# Altium PCB PCB.PcbDoc
Units mm, origin at the board's own origin, x right, y up, seen from the top; angles counter-clockwise.
Board outline 197.79 x 99.26 mm, 2 copper layers (Top Layer, Bottom Layer); 45 components, 39 nets, 173 pads, 0 vias.
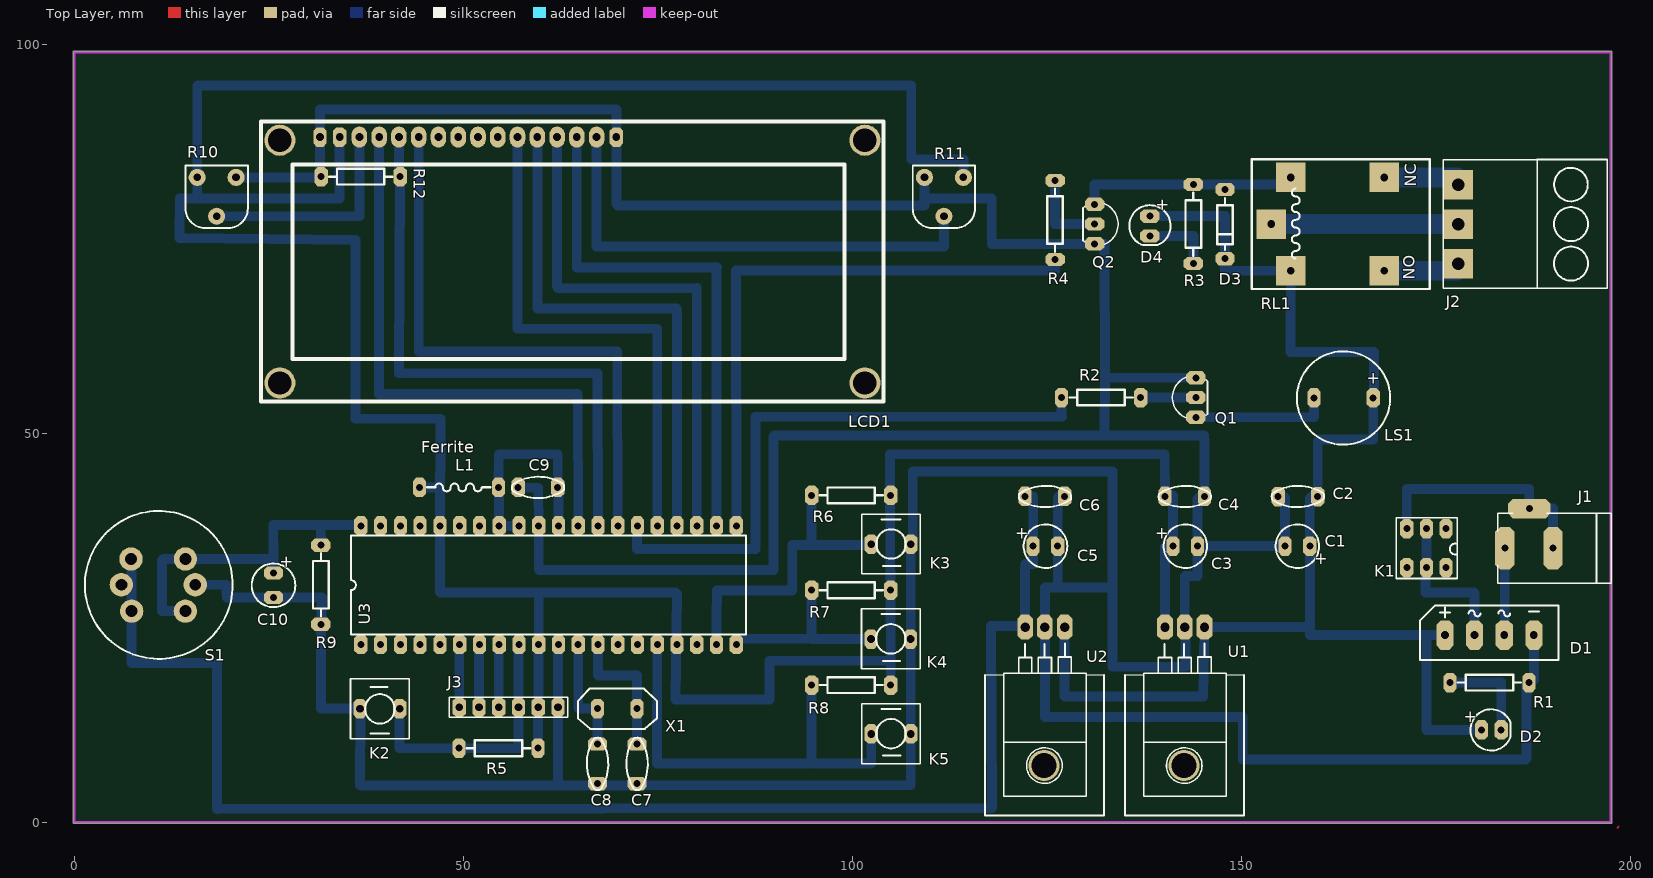
[diagram p0: Top Layer view]
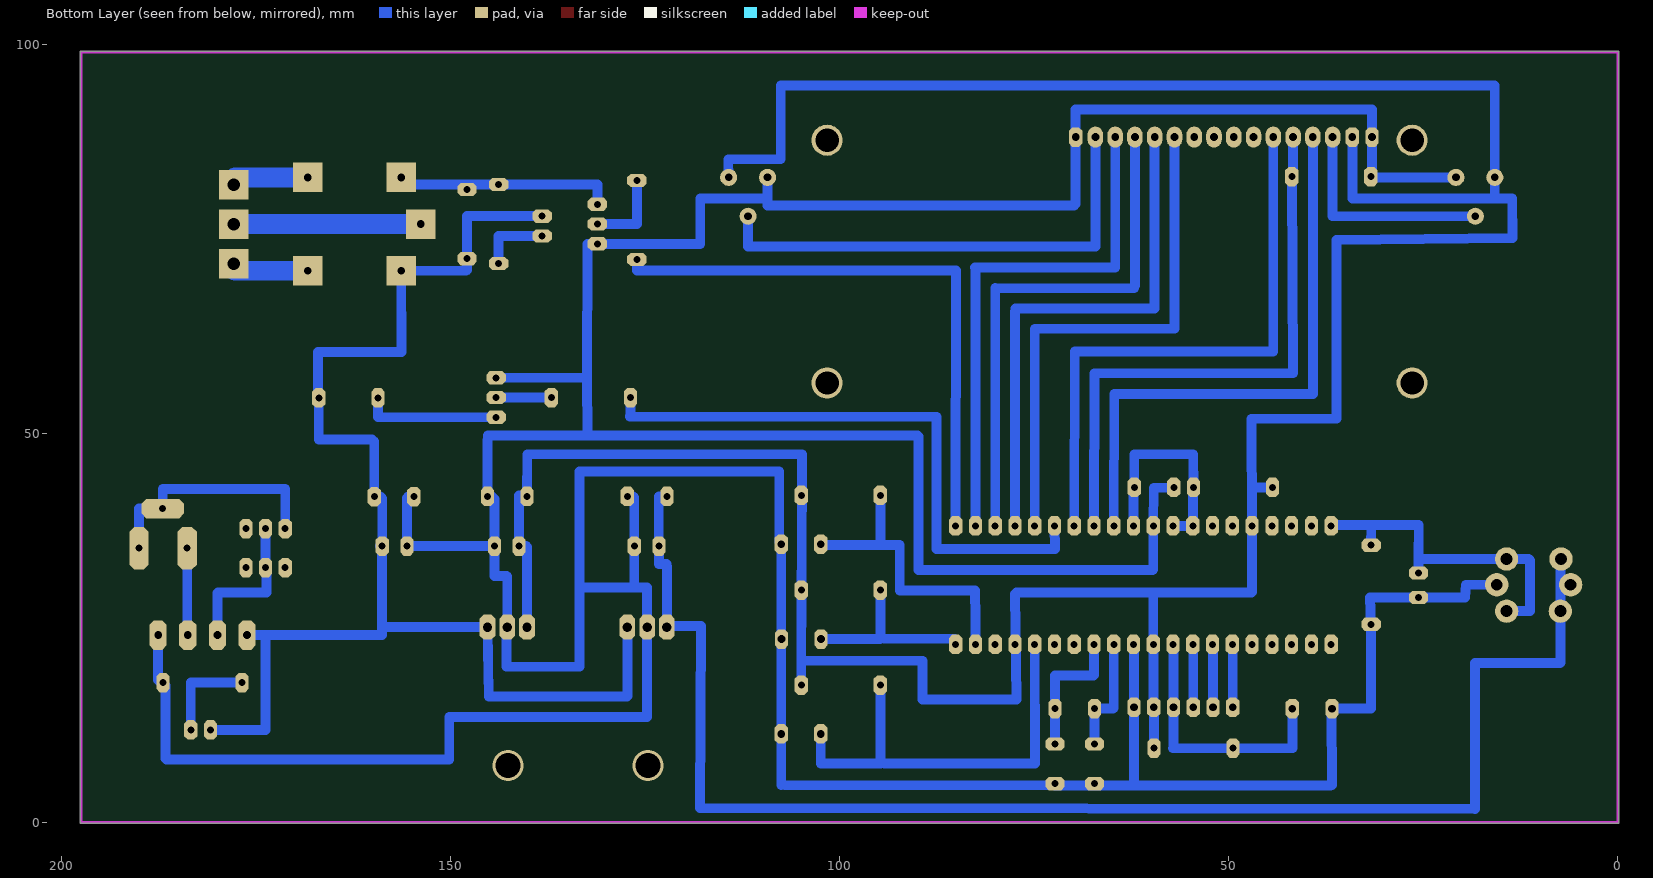
[diagram p1: Bottom Layer view, seen from below]

## Layer stack, top to bottom
Top Solder: solder mask 0.0102, Solder Resist, Dk 3.5
Top Layer: signal copper 0.0356
Dielectric1: core 0.32, FR-4, Dk 4.8
Bottom Layer: signal copper 0.0356
Bottom Solder: solder mask 0.0102, Solder Resist, Dk 3.5

## Board outline
0,-0.15 cw(c0,0) -0.15,0 -0.15,98.964 cw(c0,98.964) 0,99.114 197.485,99.114 cw(c197.485,98.964) 197.635,98.964 197.635,0 cw(c197.485,0) 197.485,-0.15

## Design rules (kind name [scope] priority, off if disabled: settings)
Clearance [All] p1: gap=0.3
FabricationTestPointUsage TestPointUsage [All] p1: valid=0 allowmultiple=FALSE
FabricationTestpoint Testpoint [All] p1: side=3 testpointundercomponent=TRUE minsize=1.016 maxsize=2.54 preferedsize=1.524 minholesize=0 maxholesize=1.016 preferedholesize=0.813 testpointgrid=0.025 allowsidetop=TRUE allowsidebottom=TRUE usegrid=TRUE gridtolerance=0
Height [All] p1: minheight=0 maxheight=30 prefheight=12.7
HoleSize [All] p1: absolutevalues=TRUE maxlimit=3 minlimit=0.025 maxpercent=80.000 minpercent=20.000
PolygonConnect [All] p1: connectstyle=Relief reliefconductorwidth=0.254 reliefentries=4 polygonreliefangle="90 Angle" airgapwidth=0.254
RoutingCorners [All] p1: cornerstyle=90-Degree minsetback=2.54 maxsetback=2.54
RoutingLayers [All] p1: top layer_v5=FALSE bottom layer_v5=TRUE
RoutingVias [All] p1: holewidth=0.8 width=1.6 viastyle="Through Hole" minholewidth=0.711 minwidth=1.27 maxholewidth=1 maxwidth=1.7
SolderMaskExpansion [All] p1: expansion=0.102
Width [All] p1: maxlimit=5 minlimit=1.27 preferedwidth=1.27
24 further rules are at their usual default settings.

## Classes and differential pairs
component class "LCD Display": LCD1 R10 R11 R12
component class Sensor: C10 R9 S1
component class Buzzer: LS1 Q1 R2
component class Power: C1 C2 C3 C4 C5 C6 D1 D2 J1 K1 R1 U1 U2 X2 X?
component class Relay: D3 D4 D? J2 Q2 R3 R4 RL1 Y?
component class Controler: C7 C8 C9 C11 C23 J3 K2 K3 K4 K5 L1 R5 R6 R7 R8 U3 X1

## Components (designator, comment, footprint, x,y, rotation, side; value= is the part's Value field where it differs from the comment)
C1 "Capacitor_1" RB_3.175mm 158.8,35.486 r180 top
C2 "Capacitor_2" RAD_5.08MM 157.276,41.86 r180 top
C3 "Capacitor_1" RB_3.175mm 141.202,35.486 r0 top
C4 "Capacitor_2" RAD_5.08MM 142.726,41.88 r0 top
C5 "Capacitor_1" RB_3.175mm 123.227,35.486 r0 top
C6 "Capacitor_2" RAD_5.08MM 124.751,41.88 r0 top
C7 "Capacitor_2" RAD_5.08MM 72.324,7.504 r90 top
C8 "Capacitor_2" RAD_5.08MM 67.244,7.504 r90 top
C9 "Capacitor_2" RAD_5.08MM 59.596,43.048 r0 top
C10 "Capacitor_1" RB_3.175mm 25.604,32.052 r270 top
D1 "Bridge" Bridg_2A 181.883,24.056 r0 top
D2 "Optical Transmitter" LED_5mm 180.867,11.864 r0 top
D3 "Diode" DIODE0.35 147.898,76.888 r270 top
D4 "Optical Transmitter" LED_5mm 138.246,77.904 r270 top
J1 "Jack_Power" Jack_Power 190.062,35.232 r180 top
J2 "Connector_3pin" Fonics_3C 177.87,76.888 r90 top (schematic designator JP1)
J3 "Connector_6pin" HDR1X6 49.48,14.78 r0 top
K1 "SW-SPDT" "KEY ON/OFF 6PIN" 173.806,35.232 r0 top (schematic designator S1)
K2 "SW-PB" SPST-2 39.276,14.6 r0 top (schematic designator K3)
K3 "SW-PB" SPST-2 104.972,35.74 r180 top
K4 "SW-PB" SPST-2 104.936,23.548 r180 top
K5 "SW-PB" SPST-2 104.972,11.356 r180 top
L1 "Ferrite" Inductor_1 54.516,43.048 r180 top
LCD1 "LCD_16*2" LCD_2x16 64.016,72.264 r0 top (schematic designator LCD?)
LS1 "Buzzer" RB_7.62mm 163.138,54.536 r0 top (schematic designator LS?)
Q1 "NPN" TO92C 144.17,54.592 r180 top
Q2 "NPN" TO92C 131.134,76.888 r0 top
R1 "Resistor" AXIAL0.4#1 176.803,17.96 r0 top
R2 "Resistor" AXIAL0.4#1 137.058,54.592 r180 top
R3 "Resistor" AXIAL0.4#1 143.834,71.808 r90 top
R4 "Resistor" AXIAL0.4#1 126.054,82.476 r270 top
R5 "Resistor" AXIAL0.4#1 59.596,9.52 r180 top
R6 "Resistor" AXIAL0.4#1 104.936,42.02 r180 top
R7 "Resistor" AXIAL0.4#1 104.936,29.828 r180 top
R8 "Resistor" AXIAL0.4#1 104.936,17.636 r180 top
R9 "Resistor" AXIAL0.4#1 31.7,35.608 r270 top
R10 "RPot1" VR8-5/5.6MM 18.296,80.392 r180 top (schematic designator R11)
R11 "RPot1" VR8-5/5.6MM 111.768,80.392 r180 top (schematic designator R10)
R12 "Resistor" AXIAL0.4#2 35.63,82.984 r0 top
RL1 "Relay_SPDT" RELAY-SPDT-1 161.106,76.888 r90 top (schematic designator K1)
S1 "MQ" MQ 10.872,30.528 r0 top
U1 "Volt Reg" TO257H 142.726,16.182 r180 top
U2 "Volt Reg" TO257H 124.751,16.182 r180 top
U3 "ATmega16_DIP40" DIP-40 61.03,30.66 r90 top
X1 "XTAL" XTAL_1 67.244,14.616 r0 top

## Footprints (in the part's own frame and the unit in brackets; to place one, negate y for a bottom-side part, rotate by r counter-clockwise, add the part's x,y. Pads: shape width x height; smd on the part's side, far side on the other; paste and mask are expansions set on the pad)
AXIAL0.4#1 [mm]
  oct 1.7x2.5 hole 0.9: 1(0,0) 2(10.16,0)
  silkscreen extent 1.02,-1.02 9.14,1.02
AXIAL0.4#2 [mm]
  oct 1.7x2.5 hole 0.9: 1(-3.9,0) 2(6.26,0)
  silkscreen extent -2.88,-1.02 5.24,1.02
Bridg_2A [mm]
  oct 2.2x3.8 hole 1: 1(5.715,0) 2(-1.905,0) 3(-5.715,0) 4(1.905,0)
  silkscreen extent -8.89,-3.17 8.89,3.81
DIODE0.35 [mm]
  oct 1.7x2.5 hole 0.9: 1(-4.445,0) 2(4.445,0)
  silkscreen extent -3.33,-1 3.33,1
DIP-40 [mm]
  oct 2.5x1.7 hole 0.9: 1(-7.8,24.2) 2(-7.8,21.66) 3(-7.8,19.12) 4(-7.8,16.58) 5(-7.8,14.04) 6(-7.8,11.5) 7(-7.8,8.96) 8(-7.8,6.42) 9(-7.8,3.88) 10(-7.8,1.34) 11(-7.8,-1.2) 12(-7.8,-3.74) 13(-7.8,-6.28) 14(-7.8,-8.82) 15(-7.8,-11.36) 16(-7.8,-13.9) 17(-7.8,-16.44) 18(-7.8,-18.98) 19(-7.8,-21.52) 20(-7.8,-24.06) 21(7.44,-24.06) 22(7.44,-21.52) 23(7.44,-18.98) 24(7.44,-16.44) 25(7.44,-13.9) 26(7.44,-11.36) 27(7.44,-8.82) 28(7.44,-6.28) 29(7.44,-3.74) 30(7.44,-1.2) 31(7.44,1.34) 32(7.44,3.88) 33(7.44,6.42) 34(7.44,8.96) 35(7.44,11.5) 36(7.44,14.04) 37(7.44,16.58) 38(7.44,19.12) 39(7.44,21.66) 40(7.44,24.2)
  silkscreen extent -6.53,-25.33 6.17,25.47
Fonics_3C [mm]
  rect 3.8x3.8 hole 1.6: 1(-5.08,0) 2(0,0) 3(5.08,0)
  silkscreen extent -8.24,-19.16 8.29,1.91
HDR1X6 [mm]
  oct 1.7x2.5 hole 1: 1(0,0) 2(2.54,0) 3(5.08,0) 4(7.62,0) 5(10.16,0) 6(12.7,0)
  silkscreen extent -1.27,-1.27 13.97,1.27
Inductor_1 [mm]
  oct 1.7x2.5 hole 0.9: 1(0,0) 2(10.16,0)
  silkscreen extent 1.02,-0.48 9.14,0.51
Jack_Power [mm]
  oct 2.5x5.5 hole 0.9: 1(6.2,0) 2(0,0)
  oct 5.5x2.5 hole 0.9: 2(3.048,-5.08)
  silkscreen extent -7.5,-4.5 7.1,4.5
"KEY ON/OFF 6PIN" [mm]
  oct 1.7x2.5 hole 0.9: 1(-2.54,2.5) 2(0,2.5) 3(2.5,2.5) 4(2.5,-2.5) 5(0,-2.5) 6(-2.54,-2.5)
  silkscreen extent -3.9,-3.9 3.94,3.9
LCD_2x16 [mm]
  round 4 hole 3: 0(-37.6,-15.8) 0(-37.6,15.4) 0(37.6,-15.8) 0(37.6,15.4)
  oct 1.7x2.5 hole 1: 1(-32.45,15.8) 2(-29.91,15.8) 16(5.65,15.8)
  oval 2x2.7 hole 1: 3(-27.37,15.8) 4(-24.83,15.8) 5(-22.29,15.8) 6(-19.75,15.8) 7(-17.21,15.8) 8(-14.67,15.8) 9(-12.13,15.8) 10(-9.59,15.8) 11(-7.05,15.8) 12(-4.51,15.8) 13(-1.97,15.8) 14(0.57,15.8) 15(3.11,15.8)
  silkscreen extent -40,-18.2 40,17.8
LED_5mm [mm]
  oct 1.7x2.5 hole 0.9: 1(0,0) 2(2.54,0)
  silkscreen extent -1.41,-2.64 3.73,2.66
MQ [mm]
  round 3 hole 1.524: 1(-3.503,-3.396) 2(-4.824,0.007) 3(-3.587,3.307) 4(3.411,3.307) 5(4.676,0.007) 6(3.406,-3.396)
  silkscreen extent -9.51,-9.52 9.48,9.48
RAD_5.08MM [mm]
  oct 1.7x2.5 hole 0.9: 1(-2.54,0) 2(2.54,0)
  silkscreen extent -3.36,-1.39 3.37,1.37
RB_3.175mm [mm]
  oct 1.7x2.5 hole 0.9: 1(0,0) 2(3.175,0)
  silkscreen extent -1.2,-2.8 4.4,2.8
RB_7.62mm [mm]
  oct 1.7x2.5 hole 0.9: 1(3.81,0) 2(-3.81,0)
  silkscreen extent -6,-6 6,6
RELAY-SPDT-1 [mm]
  rect 3.8x3.8 hole 1: 1(0,7.25) 2(-6,-7.25) 3(6,-7.25) 4(-6,4.75) 5(6,4.75)
  silkscreen extent -8.36,-13.09 8.33,9.75
SPST-2 [mm]
  oct 1.7x2.5 hole 1: 1(-2.54,0) 2(2.54,0)
  silkscreen extent -3.78,-3.87 3.75,3.82
TO92C [mm]
  oct 2.5x1.7 hole 0.9: 1(0,2.54) 2(0,0) 3(0,-2.54)
  silkscreen extent -1.48,-2.61 3.02,2.61
TO257H [mm]
  round 4 hole 3.2: 0(0.1,8.901)
  oct 2x3.2 hole 1.2: 1(-2.54,-8.901) 2(0,-8.901) 3(2.54,-8.901)
  silkscreen extent -7.62,-6.78 7.7,15.29
VR8-5/5.6MM [mm]
  round 2.2 hole 1: 1(-2.5,-2.5) 2(2.5,-2.5) 3(0,2.5)
  silkscreen extent -4,-4 4,4
XTAL_1 [mm]
  oct 1.7x2.5 hole 0.9: 1(0,0) 2(5.08,0)
  silkscreen extent -2.53,-2.6 7.63,2.58

## Part data
C1 C2 C3 C4 C5 C6 C10: "Polarized Capacitor (Radial)"
C7 C8 C9: "Capacitor"
D1: "Full Wave Diode Bridge"
D2 D4: "Typical INFRARED GaAs LED"
J1: "2-Conductor Jack"
J2: "Header, 3-Pin"
J3: "Header, 6-Pin"
K1: "Single-Pole, Double-Throw Switch, Key"
K2: "Switch"
K3 K4 K5: "Switch, Key"
L1: library part Inductor
LS1: "Sounder"
Q1 Q2: "Silicon Bipolar Transistor"
R1: "Thermistor"
R10 R11: "Potentiometer"
RL1: "SPDT Relay"
S1: "Gas Sensor"
U1 U2: "Voltage Regulator"
U3: "Atmel Microcontroller - Library created by carel..  <www.mpfreezone.com>"
X1: "Crystal Oscillator"

## Nets (pads, with @x,y where several pads share a name; then routed paths per layer and width w, separated by ;. In a path a pad name is that pad's centre, name@x,y a point inside that pad or via, vN(x,y) a via of type N, cw(c..) or ccw(c..) an arc to the next point about the centre after c; other vN are vias at no path point)
GND: C1.2 C2.2 C3.2 C4.2 C5.2 C6.2 C7.1 C8.1 C9.1 C10.2 D1.1 J3.6 K2.1 K3.1 K4.1 K5.1 LCD1.1 LCD1.16 Q1.3 Q2.3 R1.2 R9.2 R10.1 R11.2 R12.1 S1.5 U1.2 U2.2 U3.11 U3.31 | length 701.2
  Bottom Layer w1.27: S1.5 19.503,30.535 19.628,28.882 ; 19.633,28.877 31.331,28.877 31.82,28.882 R9.2 31.7,14.6 K2.1 K2.1@36.83,14.694 ; R10.1 31.638,82.892 R12.1 31.566,83.148 31.566,91.612 69.666,91.612 69.666,79.446 69.862,79.25 109.29,79.25 109.29,80.19 ; K2.1@36.787,14.6 36.736,4.804 36.896,4.714 62.18,4.728 67.244,4.73 72.324,4.733 107.004,4.752 ; C9.1 59.633,42.979 U3.31 59.69,32.508 ; 59.76,32.438 89.859,32.438 89.859,49.583 89.998,49.722 132.576,49.722 ; U3.11@62.046,23.167 62.18,23.033 62.18,4.886 ; 107.512,4.752 107.512,5.036 K5.1 107.512,23.548 K3.1 107.766,35.994 107.766,45.085 133.42,45.085 133.42,30.152 ; R11.2 109.268,80.212 109.29,80.19 ; C6.2@126.54,41.88 126.402,41.742 126.402,30.185 ; Q1.3 132.46,57.132 ; C3.2 C1.2 155.625,41.689 155.454,41.86 C2.2 ; R1.2@186.633,17.579 186.633,8.181 186.506,8.054 150.184,8.054 150.184,13.515 124.784,13.515 124.751,30.119 124.784,30.152 126.308,30.152 126.402,30.185 ; R1.2@187.279,17.96 187.598,18.279 D1.1 ; 109.29,80.19 117.926,80.19 117.926,74.348 132.404,74.348 132.46,57.132 ; 126.402,30.185 133.26,30.185 133.42,30.152 ; 132.46,57.132 132.404,49.723 132.404,49.722 132.404,49.71 132.576,49.722 ; 132.576,49.722 145.231,49.71 145.266,48.904 C4.2 144.711,41.88 144.377,41.547 144.377,31.895 144.342,31.676 142.818,31.676 142.726,31.584 U1.2 142.818,24.991 142.818,19.992 133.42,19.992 133.42,30.152
NetC7_2: C7.2 U3.13 X1.2 | length 17.9
  Bottom Layer w1.27: U3.13 67.31,18.944 67.389,18.865 72.324,18.865 X1.2 ; X1.2@72.206,14.658 72.324,14.54 C7.2
NetC8_2: C8.2 U3.12 X1.1 | length 15.2
  Bottom Layer w1.27: U3.12 64.77,14.703 64.857,14.616 X1.1 C8.2
NetC9_2: C9.2 L1.1 U3.30 U3.32 U3.33 | length 28.4
  Bottom Layer w1.27: L1.1 54.553,47.297 62.136,47.26 C9.2 62.23,42.954 U3.30 ; L1.1@54.61,42.954 U3.33 U3.32
NetC10_1: C10.1 R9.1 S1.4 S1.6 U3.40 | length 43.8
  Bottom Layer w1.27: S1.6 11.274,27.132 11.274,33.68 11.428,33.835 25.597,33.835 ; C10.1 25.604,33.828 25.597,33.835 ; R9.1 31.675,38.197 ; U3.40@36.733,38.197 31.675,38.197 ; 25.597,33.835 25.572,38.204 31.675,38.197
NetD1_2: D1.2 K1.2 K1.5 | length 20
  Bottom Layer w1.27: K1.2 173.806,32.819 173.679,32.692 173.679,29.517 179.927,29.517 179.978,29.466 D1.2
NetD1_4: D1.4 J1.1 | length 11.1
  Bottom Layer w1.27: D1.4@183.862,24.13 J1.1
NetD2_2: D2.2 R1.1 | length 12.7
  Bottom Layer w1.27: R1.1 183.382,17.96 183.407,17.935 D2.2
NetD3_1: D3.1 Q2.1 R3.2 RL1.5 | length 29.3
  Bottom Layer w1.27: Q2.1 131.134,81.968 R3.2 156.28,81.968 156.356,82.044 RL1.5 ; D3.1 D3.1@147.898,81.968
NetD4_2: D4.2 R3.1 | length 9.1
  Bottom Layer w1.27: D4.2 143.834,75.364 R3.1
NetJ1_2: J1.2 K1.1 | length 31.5
  Bottom Layer w1.27: K1.1 171.266,42.852 187.014,42.852 187.014,40.312 190.037,40.312 190.062,40.287 J1.2@190.062,35.232
NetJ2_1: J2.1 RL1.2 | length 9.6
  Bottom Layer w1.27: J2.1@177.712,70.888 J2.1@177.87,71.046
  Bottom Layer w2.54: RL1.2 J2.1@177.712,70.888
NetJ2_2: J2.2 RL1.1 | length 24
  Bottom Layer w2.54: RL1.1 J2.2
NetJ2_3: J2.3 RL1.3 | length 10.3
  Bottom Layer w1.27: J2.3@177.712,82.888 177.87,82.73 J2.3
  Bottom Layer w2.54: RL1.3 J2.3@177.712,82.888
NetJ3_1: J3.1 U3.6 | length 8
  Bottom Layer w1.27: J3.1 U3.6@49.48,22.81
NetJ3_2: J3.2 U3.7 | length 8
  Bottom Layer w1.27: J3.2 U3.7@52.02,22.81
NetJ3_3: J3.3 U3.8 | length 8
  Bottom Layer w1.27: J3.3 U3.8@54.56,22.81
NetJ3_4: J3.4 K2.2 R5.2 U3.9 | length 33.8
  Bottom Layer w1.27: K2.2 41.816,9.552 41.784,9.52 57.162,9.52 57.1,9.582 U3.9@57.1,22.81
NetK3_2: K3.2 R6.2 U3.19 | length 38.4
  Bottom Layer w1.27: U3.19 82.55,26.272 82.62,29.771 92.272,29.771 92.272,35.613 K3.2@102.051,35.613 ; 94.776,35.776 R6.2
NetK4_2: K4.2 R7.2 U3.20 | length 23.7
  Bottom Layer w1.27: U3.20 85.09,23.423 85.251,23.584 94.268,23.584 ; R7.2 94.776,23.584 94.812,23.548 K4.2
NetK5_2: K5.2 R8.2 U3.16 | length 56.3
  Bottom Layer w1.27: U3.16 74.873,7.546 94.268,7.546 ; R8.2 94.776,7.546 102.432,7.546 K5.2
NetLCD1_3: LCD1.3 R10.3 | length 28.5
  Bottom Layer w1.27: R10.3 36.634,77.892 36.646,77.904 LCD1.3
NetLCD1_4: LCD1.4 U3.29 | length 75.9
  Bottom Layer w1.27: LCD1.4 39.186,55.044 39.567,55.044 64.713,55.044 ; 64.713,54.663 64.713,55.044 ; U3.29 64.713,55.044
NetLCD1_5: LCD1.5 R12.2 U3.28 | length 75.6
  Bottom Layer w1.27: LCD1.5 41.726,83.148 R12.2 41.853,82.947 41.726,57.711 67.253,57.711 U3.28
NetLCD1_6: LCD1.6 U3.27 | length 75.5
  Bottom Layer w1.27: LCD1.6 44.266,60.505 69.793,60.505 U3.27
NetLCD1_11: LCD1.11 U3.25 | length 67.9
  Bottom Layer w1.27: LCD1.11 56.966,63.68 56.966,63.426 74.93,63.426 U3.25
NetLCD1_12: LCD1.12 U3.24 | length 67.8
  Bottom Layer w1.27: LCD1.12 59.552,87.256 59.552,66.301 59.552,66.047 77.413,66.047 77.413,65.712 77.47,65.655 U3.24
NetLCD1_13: LCD1.13 U3.23 | length 67.9
  Bottom Layer w1.27: LCD1.13 62.046,69.014 62.173,68.633 79.94,68.633 80.01,68.703 U3.23
NetLCD1_14: LCD1.14 U3.22 | length 68
  Bottom Layer w1.27: LCD1.14 64.586,71.3 82.62,71.3 82.55,71.23 U3.22
NetLCD1_15: LCD1.15 R11.3 | length 62.5
  Bottom Layer w1.27: LCD1.15 67.126,74.03 67.134,74.022 111.768,74.022 R11.3
NetLS1_2: LS1.2 Q1.1 | length 17.6
  Bottom Layer w1.27: Q1.1 159.272,52.052 159.328,52.108 LS1.2
NetQ1_2: Q1.2 R2.1 | length 7.1
  Bottom Layer w1.27: R2.1 Q1.2
NetQ2_2: Q2.2 R4.1 | length 10.7
  Bottom Layer w1.27: R4.1 126.054,76.888 Q2.2
NetR2_2: R2.2 U3.26 | length 77.1
  Bottom Layer w1.27: U3.26 72.333,35.105 87.573,35.105 87.573,52.123 126.98,52.123 126.898,52.549 R2.2
NetR4_2: R4.2 U3.21 | length 75.2
  Bottom Layer w1.27: U3.21 85.033,70.919 126.054,70.919 R4.2
NetU3_1: U3.1
VCC_1: C3.1 C4.1 J3.5 L1.2 LCD1.2 R5.1 R6.1 R7.1 R8.1 R10.2 R11.1 U1.3 U3.10 U3.17 U3.36 | length 428
  Bottom Layer w1.27: 15.796,80.698 15.818,80.317 ; LCD1.2 34.106,80.19 13.554,80.168 ; L1.2 46.851,43.048 46.99,42.909 ; R5.1 59.596,14.736 J3.5 U3.10@59.64,22.81 ; 59.633,29.517 59.69,29.46 U3.10 ; 104.428,20.754 89.351,20.754 89.351,15.801 77.286,15.801 77.47,29.333 77.286,29.517 47.047,29.517 46.99,29.574 47.017,38.1 47.06,51.869 36.138,51.869 36.138,74.856 13.532,75.11 13.554,80.168 ; R8.1 104.845,47.297 140.151,47.297 C4.1 141.085,41.88 141.202,41.998 C3.1 140.278,35.486 140.186,35.394 U1.3 ; R11.1 114.326,85.214 107.576,85.214 107.576,94.714 15.826,94.714 15.796,93.994 15.796,80.212 13.554,80.168
VCC_2: C5.1 C6.1 S1.1 S1.2 S1.3 U2.3 | length 190.9
  Bottom Layer w1.27: S1.2 7.24,30.535 S1.2@7.369,30.406 ; S1.3 7.369,33.751 7.369,20.507 7.412,20.464 15.826,20.464 18.326,20.464 18.326,17.964 18.326,1.714 117.953,1.845 117.826,25.214 122.211,25.214 U2.3 122.211,32.913 122.244,32.946 122.244,33.2 123.26,33.2 123.227,33.233 C5.1 123.26,35.519 123.26,41.836 123.216,41.88 C6.1
VSS: C1.1 C2.1 D1.3 D2.1 D3.2 D4.1 LS1.1 RL1.4 U1.1 U2.1 | length 176.6
  Bottom Layer w1.27: U2.1 127.291,16.215 127.324,16.182 145.104,16.182 U1.1 158.809,25.083 ; D4.1 147.898,77.904 147.898,70.984 147.994,70.888 RL1.4 156.326,60.464 156.576,60.464 167.076,60.464 ; C1.1 158.8,41.602 159.058,41.86 C2.1 159.816,48.928 160.09,49.202 166.948,49.202 LS1.1 ; C1.1@159.074,35.486 158.82,35.232 158.82,25.072 158.809,25.083 ; 166.948,60.342 167.076,60.464 ; LS1.1@167.076,54.464 167.076,60.464 ; 173.806,24.056 173.806,11.864 D2.1 ; D1.3 158.82,24.056 158.809,24.067 158.809,25.083
pads on no net: K1.3 K1.4 K1.6 LCD1.0 LCD1.7 LCD1.8 LCD1.9 LCD1.10 U1.0 U2.0 U3.2 U3.3 U3.4 U3.5 U3.14 U3.15 U3.18 U3.34 U3.35 U3.37 U3.38 U3.39

## Polygon pours and split planes (outlines as drawn)
no net on Top Layer "Top Layer-No Net" (hatched 90Degree grid 0.508 track 0.203, pour order 2): 198.251,-0.734 198.524,-0.734 198.524,-0.45 198.488,-0.498

## Keep-outs
Keep-Out Layer:
  lines w0.3: 0,0 0,98.964 197.485,98.964 197.485,0 0,0

## Dimensions
0,0 to 0,98.964 on Mechanical 1
0,0 to 197.485,0 on Mechanical 1

## Text inside footprints (layer, text, board x,y; h text height)
C1: Top Overlay "+" at 161.086,34.521 h1.52 r180
C3: Top Overlay "+" at 138.916,36.451 h1.52
C5: Top Overlay "+" at 120.941,36.451 h1.52
C10: Top Overlay "+" at 26.569,34.338 h1.52 r270
D2: Top Overlay "+" at 178.581,12.829 h1.52
D4: Top Overlay "+" at 139.211,80.19 h1.52 r270
LS1: Top Overlay "+" at 166.138,56.336 h1.52
RL1: Top Overlay "NC" at 172.485,81.663 h1.52 r90; Top Overlay "NO" at 172.307,69.7 h1.52 r90